# Altium PCB ESP32-S3.PcbDoc
Units mm, origin at the board's own origin, x right, y up, seen from the top; angles counter-clockwise.
Board outline 66.25 x 50.53 mm, 4 copper layers ([1] Signal, [2] GND, [3] Power, [4] Signal), stack 1.586 mm thick; 88 components, 64 nets, 347 pads, 177 vias.
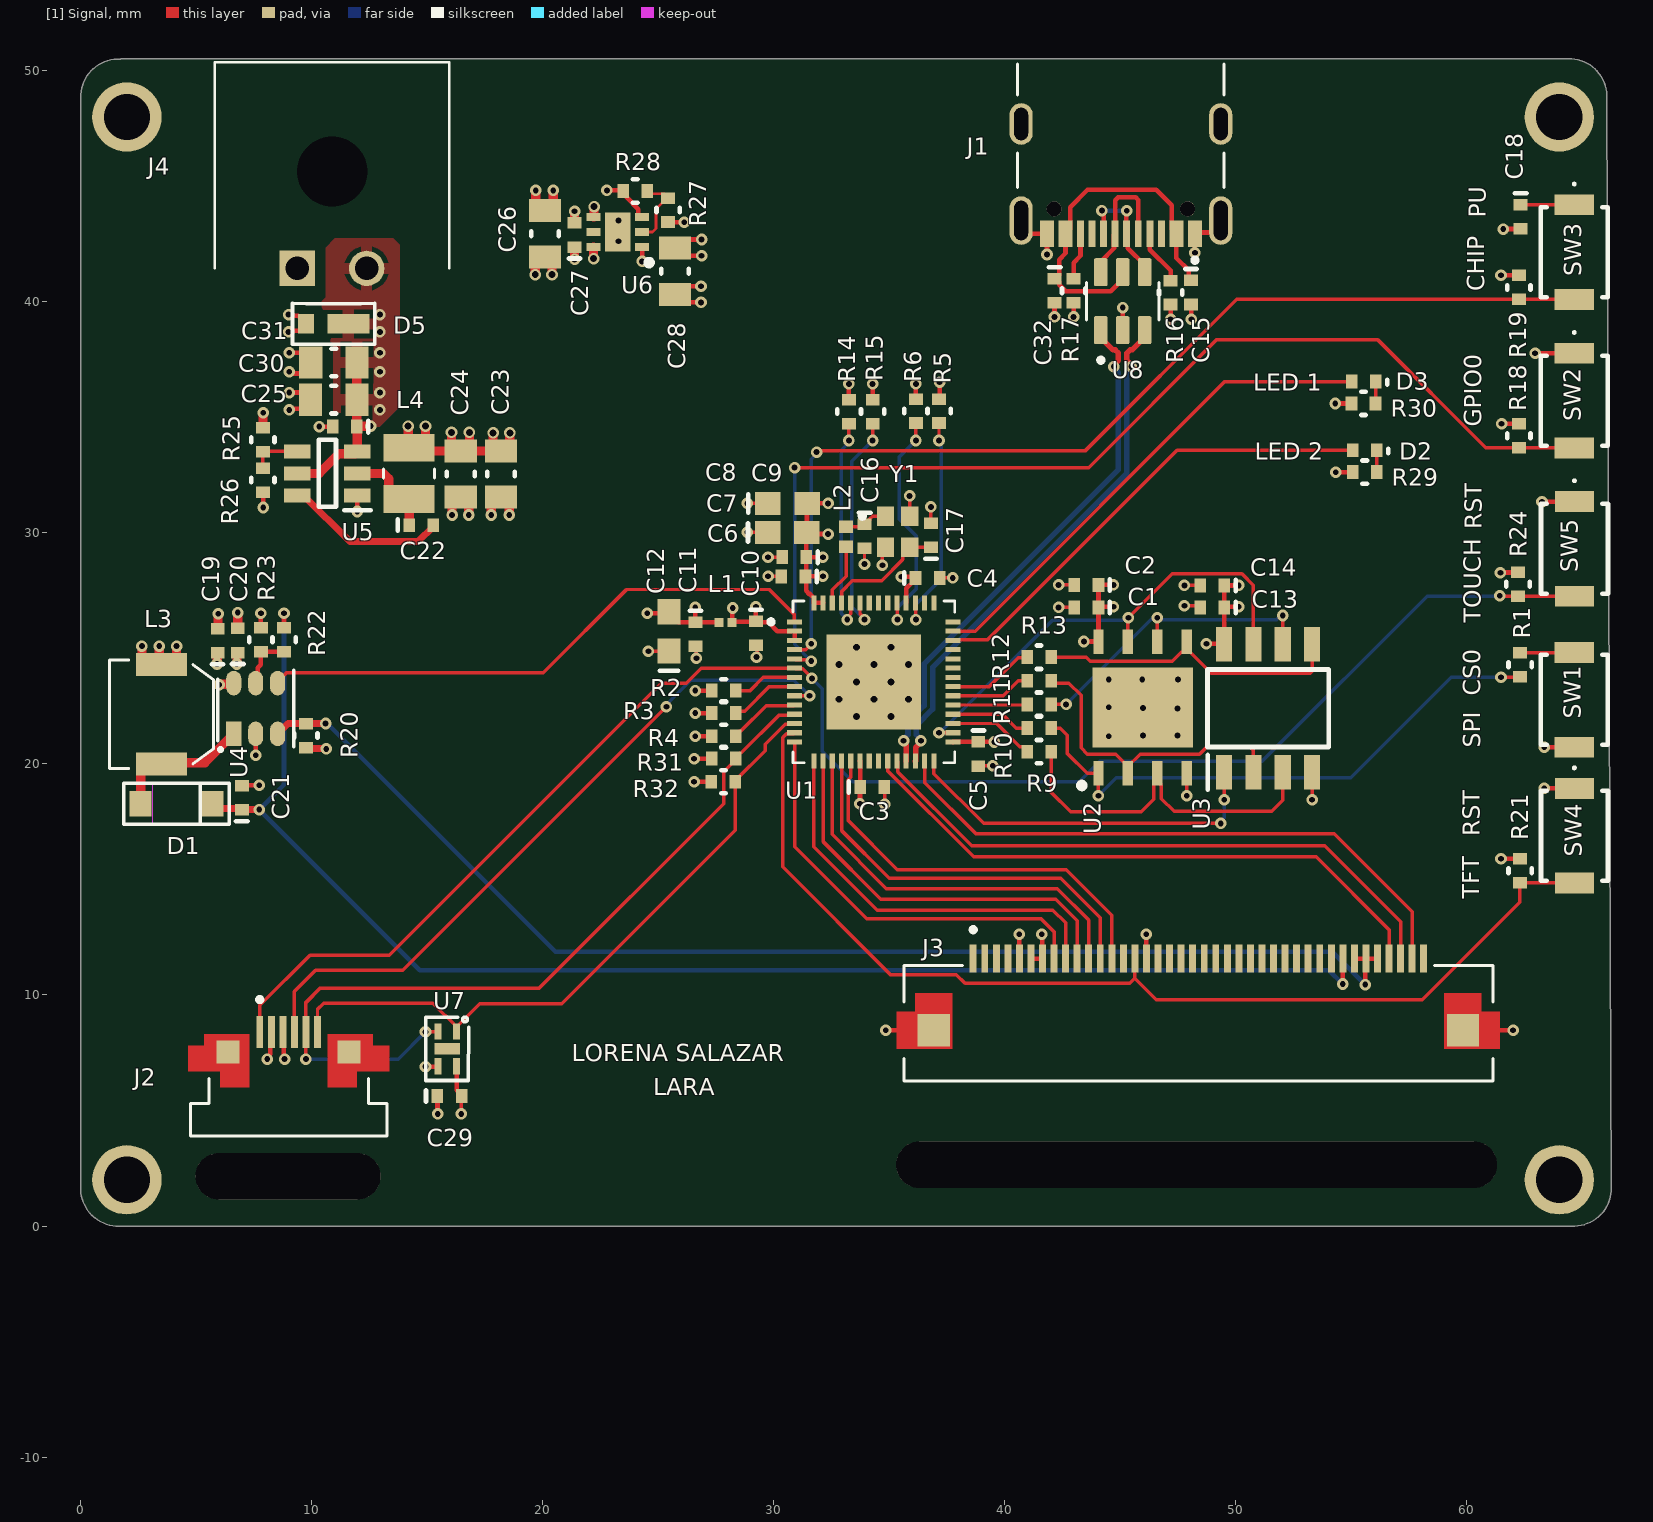
[diagram p0: [1] Signal view]
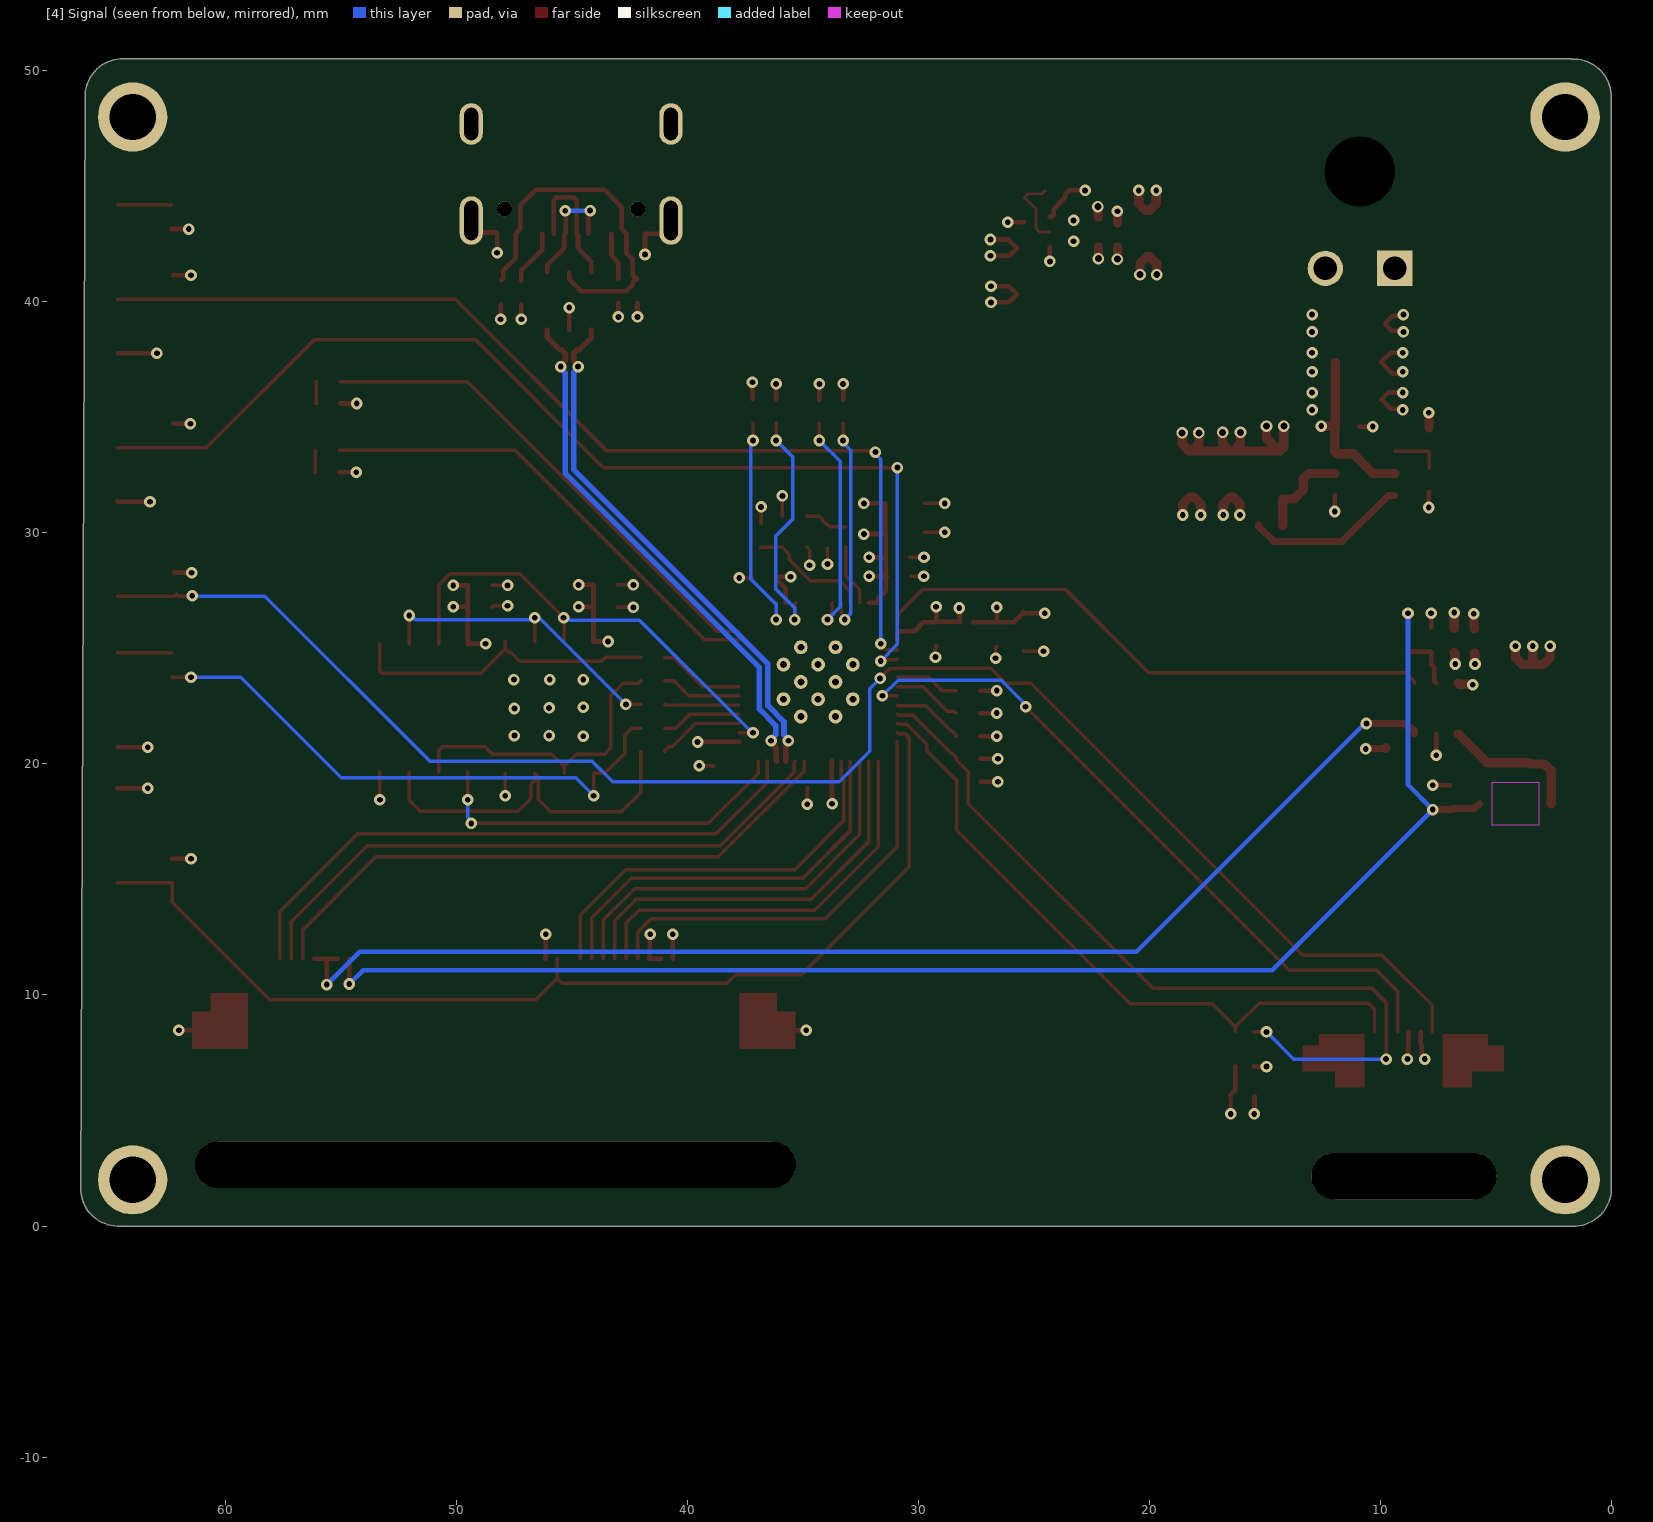
[diagram p1: [4] Signal view, seen from below]
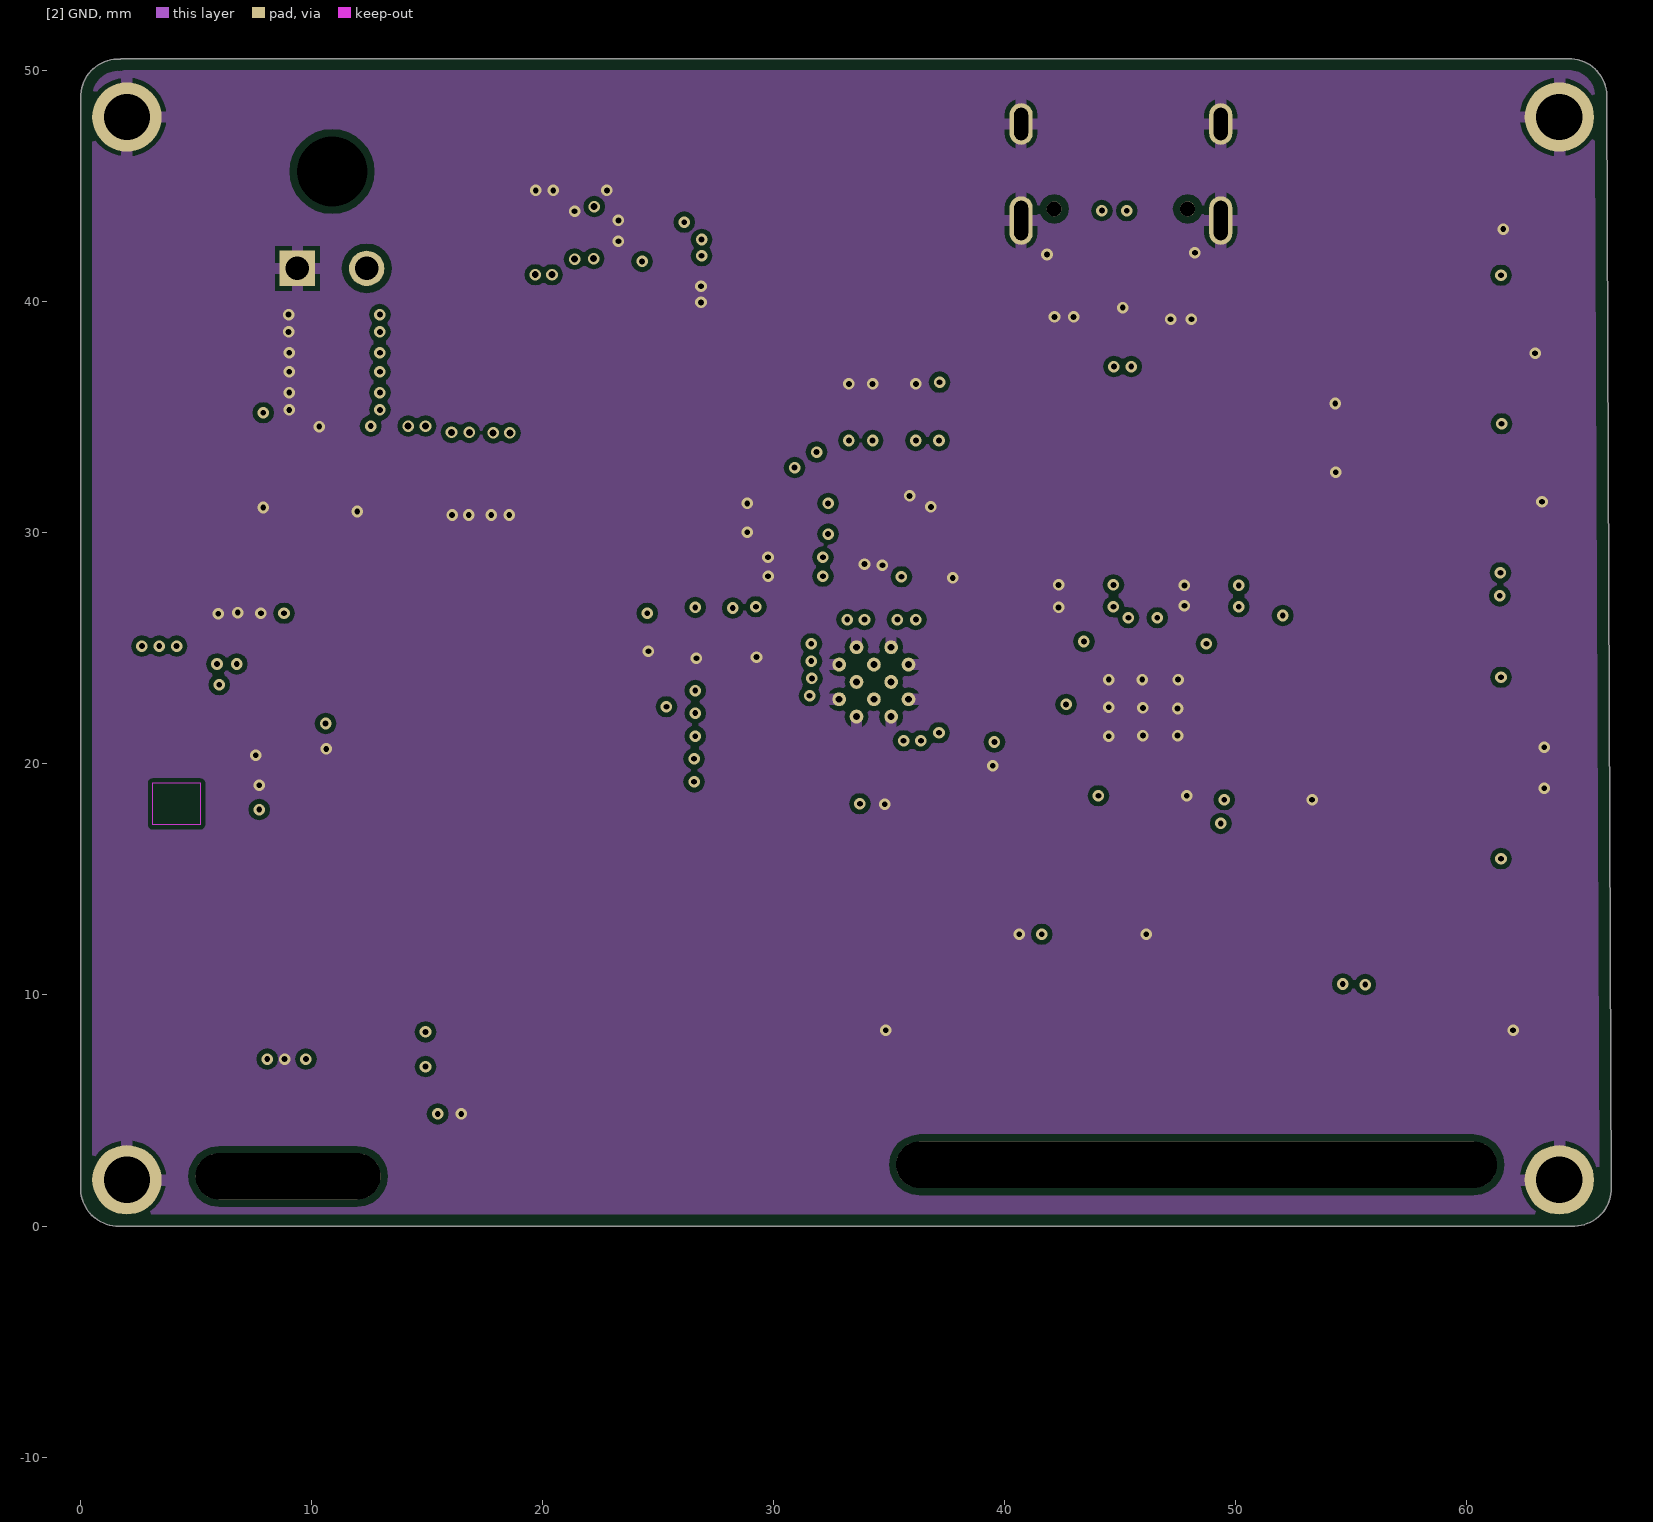
[diagram p2: [2] GND]
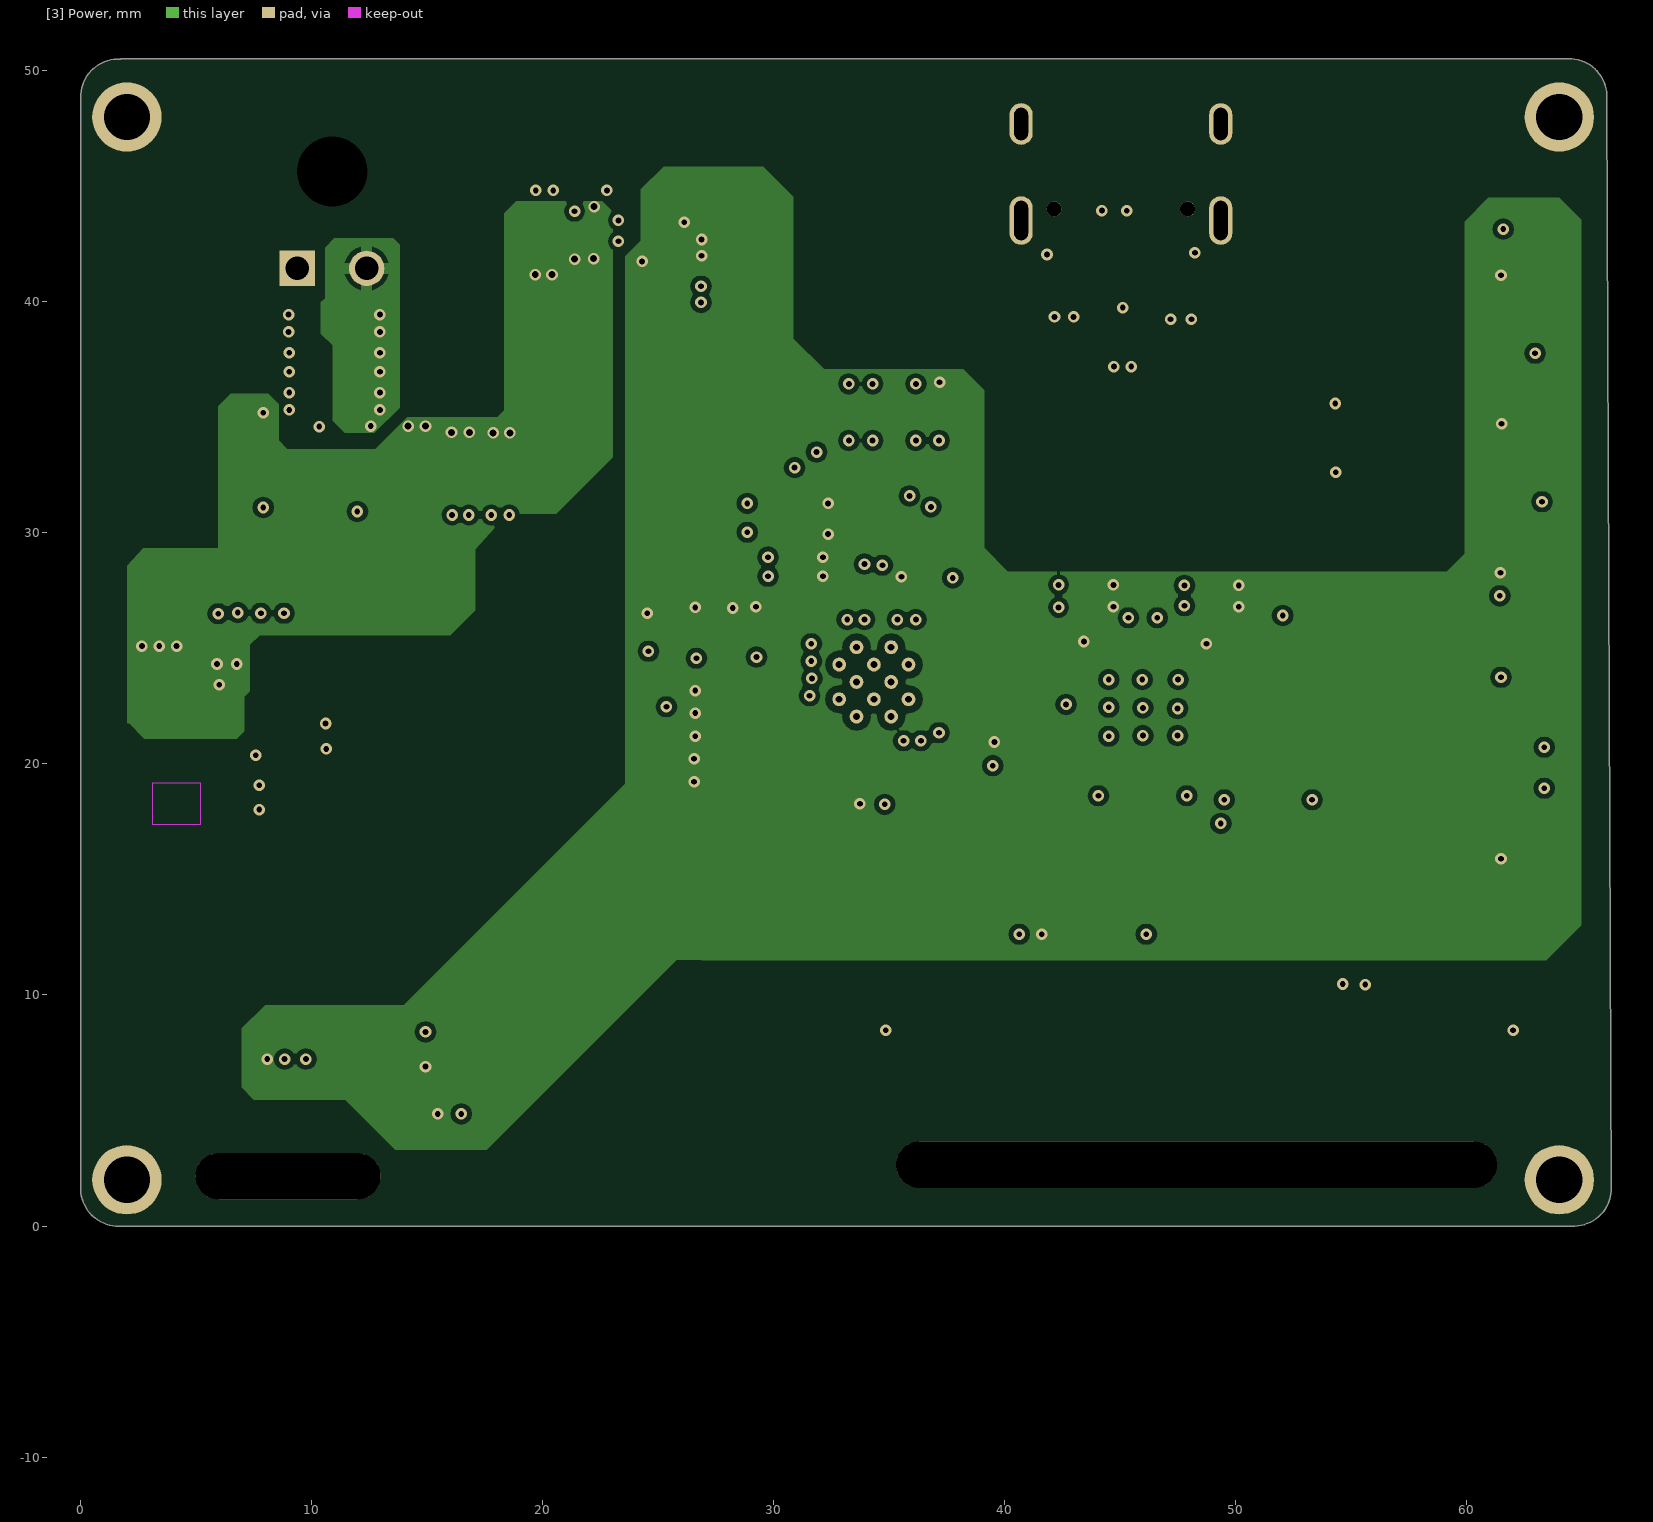
[diagram p3: [3] Power]
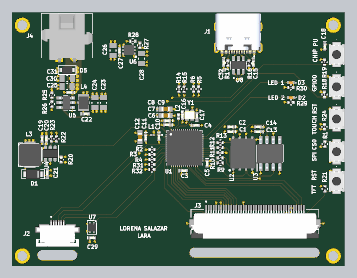
[diagram p4: 3D render of the assembled board from above, using the file's embedded part models]

## Layer stack, top to bottom
Top Solder: solder mask 0.0102, Solder Resist, Dk 3.5
[1] Signal: signal copper 0.035
Dielectric 2: prepreg 0.2104, PP-022, Dk 4.5
[2] GND: signal copper 0.0152
Dielectric 1: core 1.065, Core-009, Dk 4.5
[3] Power: signal copper 0.0152
Dielectric 3: prepreg 0.2104, PP-022, Dk 4.5
[4] Signal: signal copper 0.035
Bottom Solder: solder mask 0.0102, Solder Resist, Dk 3.5

## Board outline
1.525,0 cw(c1.625,1.625) 0,1.725 0,49.025 0,48.975 cw(c1.625,48.875) 1.725,50.5 1.725,50.525 64.525,50.525 cw(c64.425,48.9) 66.05,48.8 66.045,48.775 66.25,1.525 cw(c64.625,1.625) 64.525,0

## Design rules (kind name [scope] priority, off if disabled: settings)
BoardOutlineClearance [All] p1: gap=0.5 ignorepadtopadclearanceinfootprint=FALSE
Clearance [All] p1: gap=0.254 ignorepadtopadclearanceinfootprint=FALSE except(0.127: Arc-Arc Arc-Track Arc-SMDPad Arc-Via Track-Track Track-SMDPad Track-Via SMDPad-Via; 0.152: SMDPad-SMDPad; 0.203: Arc-Fill Arc-Poly Arc-Region Track-Fill Track-Poly Track-Region Via-Fill Via-Poly Via-Region Fill-Fill Fill-Poly Fill-Region Poly-Poly Poly-Region Region-Region; 0.25: Via-Via; 0.3: SMDPad-Fill SMDPad-Poly SMDPad-Region THPad-Fill THPad-Poly THPad-Region; 0.35: SMDPad-THPad THPad-THPad THPad-Via THPad-Text THPad-Hole)
DiffPairsRouting [InDifferentialPairClass('90_OHM_DIFF')] p1: maxlimit=0.127 minlimit=0.127 mostfreqgap=0.127 toplayer_minwidth=0.24 toplayer_maxwidth=0.24 toplayer_prefwidth=0.24 midlayer1_minwidth=0.153 midlayer1_maxwidth=0.153 midlayer1_prefwidth=0.153 midlayer2_minwidth=0.153 midlayer2_maxwidth=0.153 midlayer2_prefwidth=0.153 bottomlayer_minwidth=0.24 bottomlayer_maxwidth=0.24 bottomlayer_prefwidth=0.24 impedanceprofiledriven=TRUE impedanceprofileid={68003449-C027-477C-B721-608CC1375145} impedanceprofilevalue=90.000000 maxuncoupledlength=12.7
HoleSize [All] p1: absolutevalues=TRUE maxlimit=6.2 minlimit=0.25 maxpercent=80.000 minpercent=20.000
HoleToHoleClearance [All] p1: gap=0.2 allowstackedmicrovias=TRUE
MinimumSolderMaskSliver [All] p1: minsoldermaskwidth=0.13
PlaneConnect [All] p1: planeconnectstyle=Relief reliefexpansion=0.3 reliefentries=4 reliefconductorwidth=0.3 reliefairgap=0.2
PolygonConnect [All] p1: thpad.connectstyle=Relief thpad.reliefconductorwidth=0.5 thpad.reliefentries=4 thpad.polygonreliefangle="90 Angle" thpad.airgapwidth=0.2 smdpad.connectstyle=Relief smdpad.reliefconductorwidth=0.5 smdpad.reliefentries=4 smdpad.polygonreliefangle="90 Angle" smdpad.airgapwidth=0.2 via.connectstyle=Direct via.reliefconductorwidth=0.254 via.reliefentries=4 via.polygonreliefangle="90 Angle" via.airgapwidth=0.254
RoutingVias [All] p1: holewidth=0.25 width=0.5 viastyle="Through Hole" minholewidth=0.2 minwidth=0.2 maxholewidth=0.25 maxwidth=0.5
SilkToSolderMaskClearance [IsPad] p1: minsilkscreentomaskgap=0.15 clearancetoexposedcopper=TRUE
SolderMaskExpansion [All] p1: expansion=0.076 istentingtop=FALSE
UnRoutedNet [All] p1: checkbadconnections=TRUE
Width [All] p1: maxlimit=2 minlimit=0.127 preferedwidth=0.254
23 further rules are at their usual default settings.

## Classes and differential pairs
differential pair class 90_OHM_DIFF: USB
component class "U_[3] Voltage Converters": C22 C23 C24 C25 C26 C27 C28 C30 C31 D5 J4 L4 R25 R26 R27 R28 U5 U6
component class "U_[4] Temperature_Sensor": C29 R31 R32 U7
component class "U_[2] Led_Driver": C19 C20 C21 D1 J2 J3 L3 R20 R21 R22 R23 R24 SW4 SW5 U4
component class "U_[1] ESP32-S3": C1 C2 C3 C4 C5 C6 C7 C8 C9 C10 C11 C12 C13 C14 C15 C16 C17 C18 C32 D2 D3 J1 L1 L2 R1 R2 R3 R4 R5 R6 R9 R10 R11 R12 R13 R14 R15 R16 R17 R18 R19 R29 R30 SW1 SW2 SW3 U1 U2 U3 U8 Y1
differential pair USB: +USB_P -USB_N

## Components (designator, comment, footprint, x,y, rotation, side; value= is the part's Value field where it differs from the comment)
C1 "100nF" "Capacitor 0402" 43.023,26.775 r0 top
C2 "4.7uF" "Capacitor 0402" 43.023,27.75 r0 top
C3 "100nF" "Capacitor 0402" 34.769,19 r180 top
C4 "100nF" "Capacitor 0402" 37.164,28.05 r180 top
C5 "1uF" "Capacitor 0402" 38.85,19.923 r90 top
C6 "100nF" "Capacitor 0402" 30.342,28.119 r0 top
C7 "1uF" "Capacitor 0402" 30.373,28.95 r0 top
C8 "10uF" "Capacitor 0603" 29.696,30.019 r0 top
C9 "10uF" "Capacitor 0603" 29.702,31.275 r0 top
C10 "100nF" "Capacitor 0402" 29.231,25.15 r90 top
C11 "1uF" "Capacitor 0402" 26.606,25.1 r90 top
C12 "10uF" "Capacitor 0603" 25.456,24.85 r90 top
C13 "100nF" "Capacitor 0402" 48.473,26.775 r0 top
C14 "1uF" "Capacitor 0402" 48.473,27.725 r0 top
C15 "2.2uF" "Capacitor 0402" 48.05,39.9 r90 top
C16 "10pF" "Capacitor 0402" 33.931,29.35 r90 top
C17 "10pF" "Capacitor 0402" 36.806,30.4 r270 top
C18 "1uF" "Capacitor 0402" 62.325,43.175 r90 top
C19 "10uF" "Capacitor 0402" 5.929,25.835 r270 top
C20 "10nF" "Capacitor 0402" 6.8,25.85 r270 top
C21 "1uF" "Capacitor 0402" 6.975,19.05 r270 top
C22 "100nF" "Capacitor 0402" 15.25,30.333 r180 top
C23 "22uF" "CAPACITOR 0805" 18.192,32.55 r90 top
C24 "22uF" "CAPACITOR 0805" 16.45,32.55 r90 top
C25 "100nF" "Capacitor 0402" 10.925,34.6 r0 top
C26 "2.2uF" "CAPACITOR 0805" 20.1,42.95 r270 top
C27 "100nF" "Capacitor 0402" 21.375,43.4 r270 top
C28 "2.2uF" "CAPACITOR 0805" 25.725,41.325 r90 top
C29 "100nF" "Capacitor 0402" 16.469,5.62 r180 top
C30 "10uF" "CAPACITOR 0805" 10.951,35.77 r0 top
C31 "10uF" "CAPACITOR 0805" 10.956,37.376 r0 top
C32 "100nF" "Capacitor 0402" 42.155,39.976 r90 top
D1 "SS2040FL_R1_00001" CR_R1_00001_PNJ 4.15,18.275 r180 top
D2 "Led 0402" "LED 0402" 55.58,33.576 r0 top
D3 "Led 0402" "LED 0402" 55.53,36.551 r0 top
D5 "CUHZ16V,H3F" SOD-323HEUS2H_TOS 10.945,39.048 r180 top
J1 "UJ20-C-H-G-SMT-1-P16-TR" SAMESKY_UJ20-C-H-G-SMT-1-P16-TR 45.025,50.3 r180 top
J2 "SFV6R-2STBE1HLF" AMPHENOL_SFV6R-2STBE1HLF 9,6 r0 top locked
J3 "62684-402100ALF" AMPHENOL_62684-402100ALF 48.38,8 r0 top locked
J4 "2-1445098-2" 214450982 9.379,41.449 r180 top
L1 "MLG0603P2N0BT000" INDC0603X33N 27.906,26.125 r0 top
L2 "MLG1005S2N2CT000" INDC1005X55N 33.131,29.825 r90 top
L3 "1235AS-H-6R8M=P3" IND_1235AS-H-6R8M=P3 3.5,22.15 r270 top
L4 "MAMK2520T3R3M" INDC2520X120N 14.208,32.575 r90 top
R1 "4.7k" "Resistencia 0402" 62.3,24.294 r90 top
R2 "10K" "Resistencia 0402" 27.831,23.171 r180 top
R3 "10K" "Resistencia 0402" 27.831,22.2 r180 top
R4 "10K" "Resistencia 0402" 27.831,21.2 r180 top
R5 "10K" "Resistencia 0402" 37.156,35.275 r90 top
R6 "10K" "Resistencia 0402" 36.156,35.275 r270 top
R9 "0" "Resistencia 0402" 41.481,20.525 r0 top
R10 "0" "Resistencia 0402" 41.481,21.55 r180 top
R11 "0" "Resistencia 0402" 41.481,22.575 r0 top
R12 "0" "Resistencia 0402" 41.481,23.6 r0 top
R13 "0" "Resistencia 0402" 41.481,24.625 r0 top
R14 "10K" "Resistencia 0402" 33.256,35.25 r270 top
R15 "10K" "Resistencia 0402" 34.281,35.25 r270 top
R16 "5.1k" "Resistencia 0402" 47.175,40.404 r90 top
R17 "5.1k" "Resistencia 0402" 42.975,40.479 r90 top
R18 "10K" "Resistencia 0402" 62.25,34.2 r90 top
R19 "10K" "Resistencia 0402" 62.25,40.625 r90 top
R20 "10" "Resistencia 0402" 9.75,21.225 r90 top
R21 "10K" "Resistencia 0402" 62.3,15.379 r90 top
R22 "200k" "Resistencia 0402" 8.8,25.375 r90 top
R23 "10k" "Resistencia 0402" 7.8,25.375 r270 top
R24 "10K" "Resistencia 0402" 62.211,27.779 r90 top
R25 "52.3k" "Resistencia 0402" 7.888,34.031 r90 top
R26 "10K" "Resistencia 0402" 7.888,32.288 r90 top
R27 "50k" "Resistencia 0402" 25.425,43.975 r270 top
R28 "10K" "Resistencia 0402" 24,44.8 r0 top
R29 "220" "Resistencia 0402" 55.574,32.63 r180 top
R30 "220" "Resistencia 0402" 55.524,35.605 r180 top
R31 "10K" "Resistencia 0402" 27.826,20.237 r180 top
R32 "10K" "Resistencia 0402" 27.819,19.232 r180 top
SW1 "AMPTFP2VTR" AMPTFP2VTR 64.65,22.775 r90 top
SW2 "AMPTFP2VTR" AMPTFP2VTR 64.65,35.725 r270 top
SW3 "AMPTFP2VTR" AMPTFP2VTR 64.65,42.15 r270 top
SW4 "AMPTFP2VTR" AMPTFP2VTR 64.655,16.892 r270 top
SW5 "AMPTFP2VTR" AMPTFP2VTR 64.655,29.309 r270 top
U1 "ESP32-S3" IC_ESP32-S3 34.331,23.55 r0 top
U2 "W25Q128JVPIM" SON127P600X500X80-9N-D 45.961,22.442 r90 top
U3 "APS1604M-3SQR-SN" SOIC127P600X165-8N 51.396,22.41 r90 top
U4 "AP3032KTR-G1" SOT23-6_DIO 7.575,22.4 r90 top
U5 "AP62150WU-7" SOT95P280X100-6N 10.675,32.575 r180 top
U6 "TPS74601PBDRVR" SON65P200X200X80-7N 23.25,43.025 r180 top
U7 "SHT40-AD1B-R2" SHT4x_SEN 15.869,7.67 r270 top
U8 "USBLC6-2SC6" SOT95P280X145-6N 45.099,40.03 r90 top
Y1 "ECS-400-10-37B2-CKY-TR" XTAL_ECS-400-10-37B2-CKY-TR 35.356,30.05 r270 top

## Footprints (in the part's own frame and the unit in brackets; to place one, negate y for a bottom-side part, rotate by r counter-clockwise, add the part's x,y. Pads: shape width x height; smd on the part's side, far side on the other; paste and mask are expansions set on the pad)
214450982 [mm]
  rect 1.53x1.53 hole 1.02: 1(0,0)
  round 1.53 hole 1.02: 2(-3,0)
  round 1.525 hole 3.05 unplated: MH1(-1.5,-4.193)
  silkscreen extent -6.57,-8.92 3.57,0, body extent -6.59,-8.89 3.55,0.84, height 5.77
AMPHENOL_62684-402100ALF [mm]
  rect 0.3x1.2 smd: 01(-9.75,3.575) 02(-9.25,3.575) 03(-8.75,3.575) 04(-8.25,3.575) 05(-7.75,3.575) 06(-7.25,3.575) 07(-6.75,3.575) 08(-6.25,3.575) 09(-5.75,3.575) 10(-5.25,3.575) 11(-4.75,3.575) 12(-4.25,3.575) 13(-3.75,3.575) 14(-3.25,3.575) 15(-2.75,3.575) 16(-2.25,3.575) 17(-1.75,3.575) 18(-1.25,3.575) 19(-0.75,3.575) 20(-0.25,3.575) 21(0.25,3.575) 22(0.75,3.575) 23(1.25,3.575) 24(1.75,3.575) 25(2.25,3.575) 26(2.75,3.575) 27(3.25,3.575) 28(3.75,3.575) 29(4.25,3.575) 30(4.75,3.575) 31(5.25,3.575) 32(5.75,3.575) 33(6.25,3.575) 34(6.75,3.575) 35(7.25,3.575) 36(7.75,3.575) 37(8.25,3.575) 38(8.75,3.575) 39(9.25,3.575) 40(9.75,3.575)
  rect 1.4x1.4 smd paste-2 mask+0: S1(-11.45,0.475) S2(11.45,0.475)
  [1] Signal region: 12.25,1.275 13.05,1.275 13.05,-0.325 10.65,-0.325 10.65,2.075 12.25,2.075
  [1] Signal region: -10.65,-0.325 -13.05,-0.325 -13.05,1.275 -12.25,1.275 -12.25,2.075 -10.65,2.075
  silkscreen extent -12.75,-1.73 12.75,4.92, body extent -12.75,-2.5 12.75,3.1, height 2
AMPHENOL_SFV6R-2STBE1HLF [mm]
  rect 0.3x1.4 smd: 1(-1.25,2.4) 2(-0.75,2.4) 3(-0.25,2.4) 4(0.25,2.4) 5(0.75,2.4) 6(1.25,2.4)
  rect 1x1 smd paste-1 mask+0: SH1(-2.62,1.53) SH2(2.62,1.53)
  [1] Signal region: -1.7,0 -2.95,0 -2.95,0.7 -4.35,0.7 -4.35,1.8 -3.65,1.8 -3.65,2.3 -1.7,2.3
  [1] Signal region: 3.65,1.8 4.35,1.8 4.35,0.7 2.95,0.7 2.95,0 1.7,0 1.7,2.3 3.65,2.3
  silkscreen extent -4.25,-2.1 4.25,3.9, body extent -4.25,-2.1 4.25,2.8, height 1.87
AMPTFP2VTR [mm]
  rect 0.9x1.7 smd: 1(-2.05,0) 2(2.05,0)
  silkscreen extent -3,-1.45 1.95,1.45, body extent -2.39,-1.45 2.41,1.45, height 1.95
"Capacitor 0402" [mm] "Capacitor 0402"
  rect 0.5x0.6 smd: 1(-0.015,0) 2(1.031,0)
  silkscreen extent 1.52,-0.25 1.52,0.25, body extent 0.01,-0.26 1.01,0.27, height 0.36
"Capacitor 0603" [mm] "Chip Capacitor 0603 SMD"
  rect 1.1x1 smd: 1(0.039,0) 2(1.739,0)
  silkscreen extent -0.81,-0.4 -0.81,0.4, body extent 0.09,-0.4 1.69,0.4, height 0.9
"CAPACITOR 0805" [mm] "SMD CAPACITOR"
  rect 1x1.4 smd: 1(-1,0) 2(1,0)
  silkscreen extent -0.1,-0.6 0.1,0.6, body extent -1.05,-0.65 1.05,0.65, height 1
CR_R1_00001_PNJ [mil]
  rect 37.87x43 smd paste+0 mask+0: 1(-61.44,0) 2(61.44,0)
  [1] Signal keep-out region: -40.5,-35.5 -40.5,35.5 40.5,35.5 40.5,-35.5
  Keep-Out Layer region: -40.5,-35.5 -40.5,35.5 40.5,35.5 40.5,-35.5
  silkscreen extent -90,-35 90,35, body extent -73,-37 73,37, height 43
IC_ESP32-S3 [mm]
  rect 0.65x0.22 smd mask+0.05: 1(-3.425,2.6) 2(-3.425,2.2) 3(-3.425,1.8) 4(-3.425,1.4) 5(-3.425,1) 6(-3.425,0.6) 7(-3.425,0.2) 8(-3.425,-0.2) 9(-3.425,-0.6) 10(-3.425,-1) 11(-3.425,-1.4) 12(-3.425,-1.8) 13(-3.425,-2.2) 14(-3.425,-2.6) 29(3.425,-2.6) 30(3.425,-2.2) 31(3.425,-1.8) 32(3.425,-1.4) 33(3.425,-1) 34(3.425,-0.6) 35(3.425,-0.2) 36(3.425,0.2) 37(3.425,0.6) 38(3.425,1) 39(3.425,1.4) 40(3.425,1.8) 41(3.425,2.2) 42(3.425,2.6)
  rect 0.22x0.65 smd mask+0.05: 15(-2.6,-3.425) 16(-2.2,-3.425) 17(-1.8,-3.425) 18(-1.4,-3.425) 19(-1,-3.425) 20(-0.6,-3.425) 21(-0.2,-3.425) 22(0.2,-3.425) 23(0.6,-3.425) 24(1,-3.425) 25(1.4,-3.425) 26(1.8,-3.425) 27(2.2,-3.425) 28(2.6,-3.425) 43(2.6,3.425) 44(2.2,3.425) 45(1.8,3.425) 46(1.4,3.425) 47(1,3.425) 48(0.6,3.425) 49(0.2,3.425) 50(-0.2,3.425) 51(-0.6,3.425) 52(-1,3.425) 53(-1.4,3.425) 54(-1.8,3.425) 55(-2.2,3.425) 56(-2.6,3.425)
  rect 4.1x4.1 smd paste-1.55: 57(0,0)
  round 0.6 hole 0.3 mask+0: 58(-0.75,1.5) 59(0.75,1.5) 60(-1.5,0.75) 61(0,0.75) 62(1.5,0.75) 63(-0.75,0) 64(0.75,0) 65(-1.5,-0.75) 66(0,-0.75) 67(1.5,-0.75) 68(-0.75,-1.5) 69(0.75,-1.5)
  silkscreen extent -4.55,-3.5 3.5,3.5, body extent -3.5,-3.5 3.5,3.5, height 0.9
IND_1235AS-H-6R8M=P3 [mm]
  rect 1x2.2 smd: 1(-2.15,0) 2(2.15,0)
  silkscreen extent -2.35,-2.25 2.35,2.25, body extent -2.35,-2.25 2.35,2.25, height 1.8
INDC0603X33N [mm]
  rect 0.38x0.4 smd: 1(-0.281,0) 2(0.281,0)
INDC1005X55N [mm]
  rect 0.54x0.6 smd: 1(-0.432,0) 2(0.432,0)
  body extent -0.5,-0.25 0.5,0.25, height 0.55
INDC2520X120N [mm]
  rect 1.2x2.22 smd: 1(-1.11,0) 2(1.11,0)
  silkscreen extent -0.19,-1.1 0.19,1.1, body extent -1.25,-1 1.25,1, height 1.2
"LED 0402" [mm] "LED SMD 0402"
  rect 0.5x0.6 smd: 1(-0.519,0) 2(0.519,0)
  silkscreen extent 1.02,-0.13 1.02,0.07, body extent -0.5,-0.25 0.51,0.25, height 0.45
"Resistencia 0402" [mm]
  rect 0.5x0.6 smd: 1(-0.519,0) 2(0.519,0)
  silkscreen extent -0.1,-0.5 0.1,0.5, body extent -0.57,-0.27 0.58,0.28, height 0.41
SAMESKY_UJ20-C-H-G-SMT-1-P16-TR [mm]
  rect 0.6x1.15 smd: A1_B12(-3.2,7.345) A4_B9(-2.4,7.345) B1_A12(3.2,7.345) B4_A9(2.4,7.345)
  rect 0.3x1.15 smd: A5(-1.25,7.345) A6(-0.25,7.345) A7(0.25,7.345) A8(1.25,7.345) B5(1.75,7.345) B6(0.75,7.345) B7(-0.75,7.345) B8(-1.75,7.345)
  oval 1x2.1 hole 0.6 slot 1.7 at 90 deg: SH1(-4.32,6.78) SH2(4.32,6.78)
  oval 1x1.8 hole 0.6 slot 1.4 at 90 deg: SH3(-4.32,2.6) SH4(4.32,2.6)
  round 0.65 hole 0.65 unplated: ""(-2.89,6.28) ""(2.89,6.28)
  silkscreen extent -4.47,0 4.47,8.6, body extent -4.47,0 4.47,7.6, height 3.31
SHT4x_SEN [mil]
  rect 28x12 smd paste+0 mask+0: 1(-29.5,15.75) 2(-29.5,-15.75) 3(29.5,-15.75) 4(29.5,15.75)
  rect 20x43 smd paste+0 mask+0: 5(0,0)
  silkscreen extent -54,-37 54,37, body extent -31,-31 31,31, height 23
SOD-323HEUS2H_TOS [mil]
  rect 71x33 smd paste+0 mask+0: 1(-25.5,0)
  rect 28x33 smd paste+0 mask+0: 2(47,0)
  silkscreen extent -70,-35 70,35, body extent -53,-29 53,29, height 27
SOIC127P600X165-8N [mm]
  rect 1.5x0.7 smd: 1(-2.775,1.905) 2(-2.775,0.635) 3(-2.775,-0.635) 4(-2.775,-1.905) 5(2.775,-1.905) 6(2.775,-0.635) 7(2.775,0.635) 8(2.775,1.905)
  silkscreen extent -3.53,-2.63 1.67,2.63, body extent -3,-2.63 3,2.63, height 1.65
SON65P200X200X80-7N [mm]
  rect 0.6x0.35 smd: 1(-1.05,0.65) 2(-1.05,0) 3(-1.05,-0.65) 4(1.05,-0.65) 5(1.05,0) 6(1.05,0.65)
  rect 1.1x1.7 smd: 7(0,0)
  silkscreen extent -1.48,1.2 -1.23,1.45, body extent -1,-1 1,1, height 0.8
SON127P600X500X80-9N-D [mm]
  rect 1.05x0.45 smd: 1(-2.85,1.905) 2(-2.85,0.635) 3(-2.85,-0.635) 4(-2.85,-1.905) 5(2.85,-1.905) 6(2.85,-0.635) 7(2.85,0.635) 8(2.85,1.905)
  rect 3.45x4.35 smd: 9(0,0)
  silkscreen extent -3.5,2.5 -3.25,2.75, body extent -3.05,-2.5 3.05,2.5, height 0.8
SOT23-6_DIO [mm]
  rect 1.06x0.65 smd paste+0 mask+0: 1(-1.1,0.95)
  oval 1.06x0.65 smd paste+0 mask+0: 2(-1.1,0) 3(-1.1,-0.95) 4(1.1,-0.95) 5(1.1,0) 6(1.1,0.95)
  silkscreen extent -1.85,-1.65 1.65,1.65, body extent -1.28,-1.5 1.28,1.5, height 1.45
SOT95P280X100-6N [mm]
  rect 1.15x0.6 smd: 1(-1.3,0.95) 2(-1.3,0) 3(-1.3,-0.95) 4(1.3,-0.95) 5(1.3,0) 6(1.3,0.95)
  silkscreen extent -1.88,-1.45 0.38,1.6, body extent -1.53,-1.45 1.27,1.45, height 1
SOT95P280X145-6N [mm]
  rrect25% 1.21x0.59 smd: 1(-1.255,0.95) 2(-1.255,0) 3(-1.255,-0.95) 4(1.255,-0.95) 5(1.255,0) 6(1.255,0.95)
  silkscreen extent -2.65,-1.57 0.81,1.56, body extent -1.4,-1.46 1.4,1.46, height 0.4
XTAL_ECS-400-10-37B2-CKY-TR [mm]
  rect 0.85x0.75 smd: 1(-0.675,-0.525) 2(0.675,-0.525) 3(0.675,0.525) 4(-0.675,0.525)
  silkscreen extent -0.77,-1.62 -0.58,-1.42, body extent -1,-0.8 1,0.8, height 0.5

## Part data
C1 C2 C3 C4 C5 C6 C7 C10 C11 C13 C14 C15 C16 C17 C18 C19 C20 C21 C22 C25 C27 C29 C32: library part "Capacitor 0402", "Capacitor Ceramico SMD 0402"
C8 C9 C12: library part "Capacitor 0603", "Capacitor Ceramico SMD 0603"
C23 C24 C26 C28 C30 C31: library part "Capacitor 0805", "Capacitor Cerámico SMD 0805"
D1: "Description", Manufacturer_Name=Panjit, Copyright="Copyright (C) 2026 Ultra Librarian. All rights reserved.", Manufacturer_Part_Number=SS2040FL_R1_00001
D2 D3: library part "LED 0402", "LED SMD 0402"
D5: "16 V TVS Diode, SOD-323HE(US2H)", Manufacturer_Name="Toshiba Electronic Devices & Storage Corp.", Copyright="Copyright (C) 2025 Ultra Librarian. All rights reserved.", Manufacturer_Part_Number=CUHZ16V,H3F
J1: "USB-C (USB TYPE-C) USB 2.0 Receptacle Connector 24 (16+8 Dummy) Position Surface Mount, Right Angle; Through Hole", Package=None, Check_prices=https://www.snapeda.com/parts/UJ20-C-H-G-SMT-1-P16-TR/Same+Sky/view-part/?ref=eda, MF="Same Sky", MP=UJ20-C-H-G-SMT-1-P16-TR, SnapEDA_Link=https://www.snapeda.com/parts/UJ20-C-H-G-SMT-1-P16-TR/Same+Sky/view-part/?ref=snap
J2 Y1: Package=None, Availability=Unavailable, Price=None
  J2: MP=SFV6R-2STBE1HLF
  Y1: MP=ECS-400-10-37B2-CKY-TR
J3: "Conn Rect FPC/FFC 40Cnt SMT OPUSeries ZIF 0.5mmPitch RtAngle", Package=None, Check_prices=https://www.snapeda.com/parts/62684-402100ALF/Amphenol+FCI/view-part/?ref=eda, MF="Amphenol ICC", MP=62684-402100ALF, SnapEDA_Link=https://www.snapeda.com/parts/62684-402100ALF/Amphenol+FCI/view-part/?ref=snap
J4: "Configuration Features: Number of Rows 1", Manufacturer_Name="TE Connectivity", Mouser Part Number=571-2-1445098-2, ="Configuration Features: Number of Rows 1", Datasheet Link=https://www.te.com/commerce/DocumentDelivery/DDEController?Action=srchrtrv&DocNm=micro-mate-n-lok-connector-qrg&DocType=Data%20Sheet&DocLang=English&PartCntxt=2-1445098-2&DocFormat=pdf, Geometry.Height=5.67mm, Manufacturer_Part_Number=2-1445098-2, Mouser Price/Stock=https://www.mouser.co.uk/ProductDetail/TE-Connectivity-AMP/2-1445098-2?qs=Eu63EZxBwKKSsdV7%2Fa6T1Q%3D%3D
L1: "2 nH Unshielded Multilayer Inductor 600 mA 100mOhm Max 0201 (0603 Metric)", Package="0603 Taiyo Yuden", Availability="In Stock", Check_prices=https://www.snapeda.com/parts/MLG0603P2N0BT000/TDK/view-part/?ref=eda, MF=TDK, MP=MLG0603P2N0BT000, Price=None, Purchase-URL=https://pricing.snapeda.com/search/part/MLG0603P2N0BT000/?ref=eda, SnapEDA_Link=https://www.snapeda.com/parts/MLG0603P2N0BT000/TDK/view-part/?ref=snap
L2: "FIXED IND 2.2NH 900MA 150MOHM SM", Package="1005-2 TDK", Check_prices=https://www.snapeda.com/parts/MLG1005S2N2CT000/TDK/view-part/?ref=eda, MF="TDK Corporation", MP=MLG1005S2N2CT000, SnapEDA_Link=https://www.snapeda.com/parts/MLG1005S2N2CT000/TDK/view-part/?ref=snap
L3: "Inductor with Inductance: 6.8uH Tol. +/-20%, Package: 1818 (4745)", Package=NONSTANDARD, Check_prices=https://www.snapeda.com/parts/1235AS-H-6R8M=P3/Murata/view-part/1512974/?ref=eda, Digi-Key_Part_Number=490-14206-1-ND, MF=Murata, MP=1235AS-H-6R8M=P3, Purchase-URL=https://pricing.snapeda.com/search/part/1235AS-H-6R8M=P3/?ref=eda, SnapEDA_Link=https://www.snapeda.com/parts/1235AS-H-6R8M=P3/Murata/view-part/1512974/?ref=snap
L4: "3.3 ÂµH Shielded Drum Core, Wirewound Inductor 1.7 A 156mOhm Max 1008 (2520 Metric)", Package="2520 Taiyo Yuden", Check_prices=https://www.snapeda.com/parts/MAMK2520T3R3M/Taiyo+Yuden/view-part/?ref=eda, MF="Taiyo Yuden", MP=MAMK2520T3R3M, SnapEDA_Link=https://www.snapeda.com/parts/MAMK2520T3R3M/Taiyo+Yuden/view-part/?ref=snap
R1 R2 R3 R4 R5 R6 R9 R10 R11 R12 R13 R14 R15 R16 R17 R18 R19 R20 R21 R22 R23 R24 R25 R26 R27 R28 R29 R30 R31 R32: library part "Resistencia SMD 0402", "Resistencia SMD 0402"
SW1 SW2 SW3 SW4 SW5: "Tactile Switch SPST-NO Top Actuated Surface Mount", Manufacturer_Name=Apem, Mouser Part Number=642-AMPTFP2VTR, Datasheet Link=https://www.mouser.se/datasheet/2/26/apem_appms00196-1-1733699.pdf, Geometry.Height=2.2mm, Manufacturer_Part_Number=AMPTFP2VTR, Mouser Price/Stock=https://www.mouser.co.uk/ProductDetail/Apem/AMPTFP2VTR?qs=%252B9%2Fcbd0IE0SYwG%252BIJFZl2Q%3D%3D
U1: "IC RF TxRx + MCU Bluetooth, WiFi 802.11b/g/n, Bluetooth v5.0 2.412GHz ~ 2.484GHz 56-VFQFN Exposed Pad", Package=None, Availability="In Stock", Check_prices=https://www.snapeda.com/parts/ESP32-S3/Espressif+Systems/view-part/?ref=eda, MF="Espressif Systems", MP=ESP32-S3, Price=None, Purchase-URL=https://pricing.snapeda.com/search/part/ESP32-S3/?ref=eda, SnapEDA_Link=https://www.snapeda.com/parts/ESP32-S3/Espressif+Systems/view-part/?ref=snap
U2: "128M-bit Serial Flash Memory with uniform 4KB sectors and Dual/Quad SPI", Manufacturer_Name=Winbond, Mouser Part Number=454-W25Q128JVPIM, Datasheet Link=https://www.winbond.com/hq/search-resource-file.jsp?partNo=W25Q128JVPIM&type=datasheet, Geometry.Height=0.8mm, Manufacturer_Part_Number=W25Q128JVPIM, Mouser Price/Stock=https://www.mouser.co.uk/ProductDetail/Winbond/W25Q128JVPIM?qs=qSfuJ%252Bfl%2Fd62hi5N%252Bd7%252B%252BA%3D%3D
U3: "DRAM IoT RAM 16Mb QSPI (x1,x4) SDR 133/84MHz, RBX, 3V, Ind. Temp., SOP8"
U4: "Description", Manufacturer_Name="Diodes Inc", Copyright="Copyright (C) 2025 Ultra Librarian. All rights reserved.", Manufacturer_Part_Number=AP3032KTR-G1, RefDes=RefDes, Type=Type
U5: "Switching Voltage Regulators DCDC Conv HV Buck TSOT26 T&R 3K", Manufacturer_Name="Diodes Incorporated", Mouser Part Number=621-AP62150WU-7, Datasheet Link=https://www.diodes.com//assets/Datasheets/AP62150.pdf, Geometry.Height=1mm, Manufacturer_Part_Number=AP62150WU-7, Mouser Price/Stock=https://www.mouser.co.uk/ProductDetail/Diodes-Incorporated/AP62150WU-7?qs=yqaQSyyJnNgGPHe5Vg29cg%3D%3D
U6: "Adjustable 1-A low-dropout (LDO) linear regulator with power good", Manufacturer_Name="Texas Instruments", Mouser Part Number=595-TPS74601PBDRVR, Datasheet Link=http://www.ti.com/lit/gpn/TPS746, Geometry.Height=0.8mm, Manufacturer_Part_Number=TPS74601PBDRVR, Mouser Price/Stock=https://www.mouser.co.uk/ProductDetail/Texas-Instruments/TPS74601PBDRVR?qs=PqoDHHvF64%252B93w4aKhWy6Q%3D%3D
U7: "Humidity, Temperature 0 ~ 100% RH I2C ±1.8% RH Surface Mount", Manufacturer_Name=Sensirion, Copyright="Copyright (C) 2026 Ultra Librarian. All rights reserved.", Manufacturer_Part_Number=SHT40-AD1B-R2, RefDes=RefDes, Type=Type
U8: "17V Clamp 5A (8/20Âµs) Ipp Tvs Diode Surface Mount SOT-23-6", Package="SOT-23-6 STMicroelectronics", Availability="In Stock", Check_prices=https://www.snapeda.com/parts/USBLC6-2SC6/STMicroelectronics/view-part/?ref=eda, MF=STMicroelectronics, MP=USBLC6-2SC6, Price=None, Purchase-URL=https://pricing.snapeda.com/search/part/USBLC6-2SC6/?ref=eda, SnapEDA_Link=https://www.snapeda.com/parts/USBLC6-2SC6/STMicroelectronics/view-part/?ref=snap

## Free pads (board coordinates)
  round 3 hole 2: 3(2,2) 3(2,48) 3(64,2) 3(64,48)
  oval 8x2 hole 2 slot 8 at 0 deg: 3(8.975,2.15)
  oval 26x2 hole 2 slot 26 at 0 deg: 3(48.3,2.65)

## Via types
v1: diameter 0.5, hole 0.25, [1] Signal to [4] Signal, 166 vias
v2: diameter 0.5, hole 0.3, [1] Signal to [4] Signal, 11 vias

## Nets (pads, with @x,y where several pads share a name; then routed paths per layer and width w, separated by ;. In a path a pad name is that pad's centre, name@x,y a point inside that pad or via, vN(x,y) a via of type N, cw(c..) or ccw(c..) an arc to the next point about the centre after c; other vN are vias at no path point)
+5V: C19.2 C20.2 C23.2 C24.2 C26.2 C27.2 L3.1 L4.2 R25.2 U4.6 U6.4 U6.6 | length 19.3
  [1] Signal w0.4: v1(2.65,25.1) 2.65,24.6 2.95,24.3 L3.1 ; v1(3.4,25.1) 3.4,24.4 L3.1 ; v1(4.15,25.1) 4.15,24.6 3.85,24.3 L3.1 ; v1(5.9,24.325) 5.915,24.34 5.915,24.79 C19.2 ; v1(6,23.425) 6.019,23.444 6.569,23.444 U4.6 ; v1(6.75,24.325) 6.769,24.344 6.769,24.788 C20.2 ; R25.2 7.894,34.556 7.894,35.194 v1(7.9,35.2) ; v2(14.175,34.625) 14.175,33.718 L4.2 14.525,33.685 14.925,34.085 v2(14.925,34.625) ; L4.2@14.343,33.55 C24.2@16.35,33.55 ; v2(16.05,34.35) 16.05,33.85 C24.2@16.35,33.55 ; v2(16.825,34.35) 16.825,33.85 16.525,33.55 C24.2 ; v2(17.85,34.325) 17.85,33.85 C23.2@18.15,33.55 ; v2(18.575,34.325) 18.575,33.85 18.275,33.55 C23.2 C23.2@18.15,33.55 ; v2(19.675,41.175) 19.675,41.65 19.975,41.95 C26.2 20.4,41.65 v2(20.4,41.175) ; v2(21.375,41.85) C27.2 ; v2(22.2,41.875) U6.6 ; U6.4 22.213,43.688 22.213,44.112 v2(22.225,44.125) ; C24.2@16.35,33.55 C24.2 ; C24.2 C23.2@18.15,33.55
CHIP_PU: R19.1 SW3.2 U1.4 | length 44.8
  [1] Signal w0.15: U1.4 31.375,24.95 v1(31.625,25.2) ; v1(31.85,33.5) 31.896,33.546 43.471,33.546 50.031,40.106 R19.1 64.644,40.106 SW3.2
  [4] Signal w0.15: v1(31.625,25.2) 31.625,33.18 31.85,33.405 v1(31.85,33.5)
FB: R25.1 R26.2 U5.4 | length 2.2
  [1] Signal w0.15: R26.2 R25.1 7.9,33.525 U5.4
FB2: R27.1 R28.2 U6.2 | length 3.3
  [1] Signal w0.127: U6.2 24.751,43.025 24.9,43.174 24.9,44.019 25.375,44.494 R27.1 25.239,44.68 24.639,44.68 R28.2
GND: C1.1 C2.1 C3.1 C4.1 C5.1 C6.1 C7.1 C8.1 C9.1 C10.1 C11.1 C12.1 C13.1 C14.1 C15.1 C16.1 C17.1 C18.1 C19.1 C20.1 C21.1 C23.1 C24.1 C25.1 C26.1 C27.1 C28.1 C29.1 C30.1 C31.1 C32.1 D5.2 J1.A1_B12 J1.B1_A12 J1.SH1 J1.SH2 J1.SH3 J1.SH4 J2.3 J3.05 J3.16 J3.S1 J3.S2 J4.1 pad.3@2,2 pad.3@2,48 pad.3@64,2 pad.3@64,48 R6.1 R14.1 R15.1 R16.1 R17.1 R20.1 R23.1 R26.1 R28.1 R29.2 R30.2 SW1.1 SW2.1 SW4.1 SW5.1 U1.57 U1.58 U1.59 U1.60 U1.61 U1.62 U1.63 U1.64 U1.65 U1.66 U1.67 U1.68 U1.69 U2.4 U2.9 U3.4 U4.2 U5.1 U6.3 U6.7 U7.4 U8.2 Y1.2 Y1.4 | length 67.3
  [1] Signal w0.15: v1(16.475,4.85) 16.475,5.61 C29.1 ; v1@24.5,24.875 v1(24.575,24.875) 25.442,24.875 C12.1 ; C11.1 26.65,25.041 v1(26.65,24.575) ; v1@28.725,30.025 v1(28.85,30.025) 29.729,30.025 C8.1 ; v1@28.975,31.275 C9.1 ; C10.1 29.171,25.075 29.275,24.971 v1@29.275,24.65 ; v1@29.675,28.125 v1(29.75,28.125) 30.321,28.125 C6.1 ; v1@29.675,28.95 v1(29.75,28.95) C7.1 ; v1(33.925,28.65) 33.925,29.329 C16.1 ; v1(34.7,28.6) 34.7,29.244 Y1.2 ; C3.1 34.8,18.984 v1(34.8,18.25) ; v1(35.875,31.6) 35.875,30.731 Y1.4 ; v1(36.8,31.125) 36.8,30.421 C17.1 ; C4.1 v1(37.75,28.05) v1@37.875,28.05 ; C5.1 38.867,19.925 v1(39.475,19.925) ; v1(42.325,26.775) C1.1 ; v1(42.325,27.75) C2.1 ; v1(47.775,26.85) 48.383,26.85 C13.1 ; v1(47.775,27.725) C14.1 ; U2.4 47.875,19.582 v1(47.875,18.625) ; v1(53.3,18.45) U3.4@53.3,19.634
  [1] Signal w0.2: C21.1 6.98,19.07 7.72,19.07 v1(7.725,19.075) ; v1(7.575,20.375) U4.2 ; R23.1 v1(7.8,26.525) ; R26.1 7.9,31.756 v1(7.9,31.1) ; J2.3 8.788,8.363 8.788,7.262 v1(8.825,7.225) ; v1(9,38.7) 9.044,38.744 9.496,38.744 9.752,39 D5.2 9.752,39.112 9.496,39.367 9.432,39.367 9.407,39.393 9.057,39.393 v1(9,39.45) ; v1@9.025,35.375 9.546,35.375 9.946,35.775 9.646,36.075 v1(9.025,36.075) ; v1@9.025,36.9 9.479,36.9 C31.1 9.956,37.4 9.556,37.8 v1(9.025,37.8) ; R20.1 R20.1@9.806,20.65 ; v1@10.25,34.6 v1(10.325,34.6) C25.1 ; v1(11.975,30.925) U5.1 ; U7.4 16.269,5.885 16.484,5.67 C29.1 ; v1(22.775,44.825) 23.456,44.825 R28.1 23.631,44.65 23.631,44.519 24.138,44.012 24.138,43.75 24.213,43.675 U6.3 ; v1(26.85,39.975) 26.075,39.975 C28.1 26.075,40.675 v1(26.85,40.675) ; v1(33.25,36.45) 33.25,35.775 R14.1 ; v1(34.275,36.45) 34.275,35.775 R15.1 ; v1(34.85,8.475) J3.S1 ; v1(36.15,36.45) 36.15,35.8 R6.1 ; v1(40.625,12.625) 40.628,12.622 40.628,11.578 J3.05 ; J1.SH2 40.705,43.325 41.075,42.955 J1.B1_A12 v1(41.825,42.05) ; v1(42.15,39.35) 42.15,39.957 C32.1 ; v1(42.975,39.35) R17.1 ; U8.2@45.099,38.776 v1@45.099,39.749 ; v1(46.125,12.625) 46.127,12.623 46.127,11.578 J3.16 ; v1(47.175,39.25) R16.1 ; C15.1 48.075,39.86 v1(48.075,39.25) ; v1(48.225,42.125) J1.A1_B12 48.27,43 48.975,43 49.345,43.37 J1.SH1 ; v1(54.3,35.6) 55,35.6 R30.2 ; v1(54.325,32.625) 55.05,32.625 R29.2 ; J3.S2 v1(62,8.475) ; v1(61.575,43.15) 61.58,43.155 62.32,43.155 C18.1 ; v1(62.95,37.775) SW2.1 ; v1(63.25,31.35) 64.646,31.35 SW5.1 ; v1(63.35,18.95) 64.647,18.95 SW4.1 ; v1(63.35,20.725) SW1.1
  [1] Signal w0.3: R20.1@9.787,20.669 v1@10.606,20.669
  [1] Signal w0.4: C19.1 5.94,25.861 5.94,26.49 v1(5.95,26.5) ; C20.1 v1(6.8,26.55) ; R20.1 R20.1@9.787,20.669 ; v1@10.606,20.669 v1(10.625,20.65) ; v1(16.075,30.775) 16.075,31.25 16.375,31.55 C24.1 16.5,31.55 16.8,31.25 v1(16.8,30.775) ; v1(17.775,30.775) 17.775,31.25 18.075,31.55 C23.1 18.25,31.55 18.55,31.25 v1(18.55,30.775) ; v1(19.7,44.825) 19.7,44.25 20,43.95 C26.1 20.15,43.95 20.45,44.25 v1(20.45,44.825) ; C27.1 v1(21.375,43.925)
  other v1: 44.5,21.2 45.975,21.225 47.475,21.225 47.475,22.4 45.975,22.425 44.5,22.45 44.5,23.65 45.95,23.65 47.5,23.65 29.25,24.625 28.85,31.275 9.025,35.325 9.025,36.975 45.1,39.75 23.275,42.625 23.275,43.525
GPIO0: R18.1 SW2.2 U1.5 | length 47.4
  [1] Signal w0.15: v1(30.9,32.825) 43.625,32.825 49.15,38.35 56.15,38.35 60.819,33.681 R18.1 64.644,33.681 SW2.2 ; U1.5 30.941,24.515 31.56,24.515 v1(31.625,24.45)
  [4] Signal w0.15: v1(30.9,32.825) 30.9,25.175 v1(31.625,24.45)
GPIO2: R2.1 U1.7 | length 2.8
  [1] Signal w0.15: R2.1 28.971,23.171 29.55,23.75 U1.7
GPIO5: R4.1 U1.10 | length 3.1
  [1] Signal w0.15: R4.1 28.35,21.25 28.525,21.425 28.575,21.425 29.665,22.515 30.871,22.515 U1.10
LED_1: D2.1 U1.40 | length 20.7
  [1] Signal w0.15: U1.40 37.791,25.385 39.26,25.385 47.451,33.576 D2.1
LED_2: D3.1 U1.41 | length 21.7
  [1] Signal w0.15: U1.41 38.725,25.75 49.526,36.551 D3.1
LED_A: C21.2 D1.1 J3.33 R22.2 | length 62.8
  [1] Signal w0.2: R22.2 v1(8.8,26.525) ; v1(54.625,10.475) 54.625,11.57 J3.33
  [1] Signal w0.3: D1.1 5.916,18.069 6.875,18.069 6.925,18.019 C21.2 6.978,18.022 7.722,18.022 v1(7.725,18.025)
  [4] Signal w0.2: v1(8.8,26.525) 8.8,19.1 v1(7.725,18.025) 14.675,11.075 54.025,11.075 v1(54.625,10.475)
LED_K: J3.34 J3.35 J3.36 R20.2 U4.3 | length 54.1
  [1] Signal w0.2: J3.34 55.6,11.575 v1(55.6,10.45) ; J3.35 J3.36
  [1] Signal w0.3: U4.3 8.525,21.437 8.64,21.553 8.778,21.553 8.969,21.744 R20.2 9.753,21.747 10.597,21.747 v1(10.6,21.75)
  [4] Signal w0.2: v1(10.6,21.75) 10.675,21.75 20.55,11.875 54.175,11.875 v1(55.6,10.45)
MTDI: R6.2 U1.47 | length 10.2
  [1] Signal w0.15: U1.47 35.341,26.965 35.341,26.26 v1(35.35,26.25) ; v1(36.15,34) 36.15,34.75 R6.2
  [4] Signal w0.15: v1(35.35,26.25) 35.35,26.75 36.175,27.575 36.175,29.85 35.421,30.604 35.421,33.271 v1(36.15,34)
MTDO: R5.1 U1.45 | length 9.7
  [1] Signal w0.15: U1.45 36.14,26.965 36.14,26.26 v1(36.15,26.25) ; v1(37.15,34) 37.15,34.75 R5.1
  [4] Signal w0.15: v1(36.15,26.25) 36.15,26.9 37.254,28.004 37.254,32.369 37.25,32.373 37.25,33.737 37.217,33.77 37.217,33.933 v1(37.15,34)
NetC16_2: C16.2 L2.2 Y1.1 | length 1.9
  [1] Signal w0.15: L2.2 33.807,30.257 C16.2 33.981,30.381 34.156,30.556 34.156,30.606 34.275,30.725 Y1.1
NetC18_2: C18.2 SW3.1 | length 2.3
  [1] Signal w0.15: C18.2 64.644,44.206 SW3.1
NetC22_1: C22.1 U5.6 | length 7
  [1] Signal w0.3: U5.6 9.65,31.625 11.65,29.625 14.607,29.625 15.265,30.283 C22.1
NetD1_2: D1.2 L3.2 U4.1 | length 6.1
  [1] Signal w0.4: D1.2 2.6,18.286 2.6,19.7 2.9,20 L3.2 3.55,20.05 5.375,20.05 U4.1
NetD2_2: D2.2 R29.1 | length 0.9
  [1] Signal w0.15: R29.1 56.099,32.636 D2.2
NetD3_2: D3.2 R30.1 | length 0.9
  [1] Signal w0.15: R30.1 56.049,35.611 D3.2
NetJ1_A5: J1.A5 R16.2 | length 2.4
  [1] Signal w0.2: J1.A5 46.275,42.259 47.175,41.359 R16.2
NetJ1_A6: J1.A6 J1.B6 U8.4 | length 5.1
  [1] Signal w0.2: J1.B6 v1@44.275,43.95 ; v1(45.279,43.946) 45.257,43.925 45.257,42.973 J1.A6 45.325,42.905 45.325,42.319 46.049,41.595 U8.4
  [4] Signal w0.2: v1(44.2,43.95) 44.202,43.948 v1(45.279,43.946) v1(45.279,43.946)
NetJ1_A7: J1.A7 J1.B7 U8.6 | length 5.8
  [1] Signal w0.2: U8.6 U8.6@44.149,41.595 ; U8.6@44.149,41.745 44.725,42.321 44.725,42.905 J1.A7 44.775,44.4 44.9,44.525 45.658,44.525 45.775,44.408 J1.B7
NetJ1_B5: J1.B5 R17.2 | length 2.1
  [1] Signal w0.2: R17.2 42.975,41.7 43.275,42 J1.B5
NetJ2_4: J2.4 U1.9 | length 30.5
  [1] Signal w0.15: J2.4 9.25,10.15 10.163,11.063 13.938,11.063 v1(25.35,22.475) ; U1.9 v1@31.475,22.95
  [4] Signal w0.15: v1(25.35,22.475) 25.35,22.567 26.412,23.629 30.871,23.629 v1(31.55,22.95)
NetJ2_5: J2.5 R31.1 U1.11 U7.2 | length 35.9
  [1] Signal w0.15: v1(9.75,7.225) J2.5 9.75,9.675 10.375,10.3 19.85,10.3 27.825,18.275 27.825,19.667 28.345,20.187 R31.1 28.345,20.287 28.52,20.462 28.57,20.462 30.223,22.115 30.871,22.115 U1.11 ; v1(14.925,8.4) 15.451,8.4 U7.2
  [4] Signal w0.15: v1(9.75,7.225) 13.75,7.225 v1(14.925,8.4)
NetJ2_6: J2.6 R32.1 U1.12 U7.1 | length 29.2
  [1] Signal w0.15: J2.6 10.25,9.375 10.525,9.65 15.241,9.65 U7.1@16.269,8.622 ; U7.1 U7.1@16.269,8.622 ; U1.12 30.871,21.715 30.49,21.715 29.625,20.85 29.625,20.568 28.338,19.282 R32.1 28.325,19.218 28.325,17.125 20.825,9.625 17.272,9.625 U7.1@16.269,8.622
NetJ3_08: J3.08 U1.14 | length 18.4
  [1] Signal w0.15: U1.14 30.906,16.419 34.025,13.3 41.567,13.3 42.13,12.737 J3.08
NetJ3_09: J3.09 U1.15 | length 17.5
  [1] Signal w0.15: U1.15 31.731,16.419 34.475,13.675 42.075,13.675 42.63,13.12 J3.09
NetJ3_10: J3.10 U1.16 | length 17.5
  [1] Signal w0.15: U1.16 32.131,16.644 34.625,14.15 42.2,14.15 43.13,13.22 J3.10
NetJ3_11: J3.11 U1.17 | length 17.5
  [1] Signal w0.15: U1.17 32.525,20.119 32.525,16.95 34.875,14.6 42.275,14.6 43.63,13.245 J3.11
NetJ3_12: J3.12 U1.18 | length 17.5
  [1] Signal w0.15: U1.18 32.931,17.119 35,15.05 42.425,15.05 44.13,13.345 J3.12
NetJ3_13: J3.13 U1.19 | length 17.6
  [1] Signal w0.15: U1.19 33.331,19.429 33.225,19.323 33.225,17.55 35.35,15.425 42.65,15.425 44.63,13.445 J3.13
NetJ3_37: J3.37 U1.23 | length 26.2
  [1] Signal w0.15: U1.23 34.942,20.114 34.942,19.683 38.65,15.975 53.475,15.975 56.63,12.82 J3.37
NetJ3_38: J3.38 U1.24 | length 26.5
  [1] Signal w0.15: U1.24 35.366,20.09 35.366,19.651 38.567,16.45 53.85,16.45 57.13,13.17 J3.38
NetJ3_39: J3.39 U1.27 | length 26.4
  [1] Signal w0.15: U1.27 36.539,20.117 36.539,19.186 38.75,16.975 49.158,16.975 49.162,16.971 49.538,16.971 49.542,16.975 54.25,16.975 57.63,13.595 J3.39
NetR1_2: R1.2 SW1.2 | length 2.4
  [1] Signal w0.15: R1.2 64.638,24.813 SW1.2
NetR3_1: R3.1 U1.8 | length 3
  [1] Signal w0.15: R3.1 28.437,22.287 28.737,22.287 29.8,23.35 U1.8
NetR9_1: R9.1 U1.31 | length 3.7
  [1] Signal w0.15: U1.31 39.65,21.75 40.65,20.75 40.787,20.75 40.962,20.575 R9.1
NetR10_2: R10.2 U1.32 | length 3.5
  [1] Signal w0.15: U1.32 39.9,22.15 40.5,21.55 R10.2
NetR11_1: R11.1 U1.33 | length 3.2
  [1] Signal w0.15: U1.33 40.937,22.55 R11.1
NetR12_1: R12.1 U1.34 | length 3.5
  [1] Signal w0.15: U1.34 39.925,22.95 40.575,23.6 R12.1
NetR13_1: R13.1 U1.35 | length 3.7
  [1] Signal w0.15: U1.35 39.325,23.35 40.575,24.6 40.937,24.6 R13.1
NetR14_2: R14.2 U1.52 | length 9.5
  [1] Signal w0.15: v1(33.175,26.25) 33.175,26.344 33.331,26.5 U1.52 ; v1(33.25,34) 33.25,34.725 R14.2
  [4] Signal w0.15: v1(33.175,26.25) 33.175,26.263 32.925,26.513 32.925,33.58 33.25,33.905 v1(33.25,34)
NetR15_2: R15.2 U1.51 | length 9.9
  [1] Signal w0.15: U1.51 33.731,26.5 33.925,26.306 v1(33.925,26.25) ; v1(34.275,34) 34.275,34.725 R15.2
  [4] Signal w0.15: v1(33.925,26.25) 33.375,26.8 33.375,33.1 v1(34.275,34)
NetU1_1: U1.1 U4.4 | length 24.9
  [1] Signal w0.15: U4.4 8.525,23.57 8.906,23.951 20.026,23.951 23.625,27.55 29.8,27.55 30.875,26.475 30.875,26.181 U1.1
OV: R22.1 R23.2 U4.5 | length 2.4
  [1] Signal w0.2: U4.5 7.661,23.586 7.661,24.161 7.8,24.3 R23.2 R22.1
SPICLK: R11.2 U2.6 U3.6 | length 14
  [1] Signal w0.15: R11.2 v1(42.65,22.575) ; U2.6 46.6,25.296 v1(46.6,26.325) ; v1(52.025,26.425) 52.025,25.191 U3.6
  [4] Signal w0.15: v1(42.65,22.575) 46.333,26.258 46.533,26.258 v1@46.65,26.375 ; v1(46.6,26.325) 46.695,26.325 46.77,26.25 51.762,26.25 51.937,26.425 v1(52.025,26.425)
SPICS0: R1.1 R10.1 U2.1 | length 24.7
  [1] Signal w0.15: R10.1 42.4,21.55 42.7,21.25 42.7,20.45 43.558,19.592 U2.1 44.05,19.586 v1(44.05,18.625) ; v1(61.475,23.75) 62.275,23.75 R1.1
  [4] Signal w0.15: v1(44.05,18.625) 44.825,19.4 54.975,19.4 59.325,23.75 v1(61.475,23.75)
SPICS1: U1.28 U3.1 | length 16.1
  [1] Signal w0.15: U1.28 36.931,19.575 39.081,17.425 v1(49.35,17.425) ; U3.1 49.5,19.626 v1(49.5,18.45)
  [4] Signal w0.15: v1(49.35,17.425) 49.35,17.52 49.5,17.67 v1(49.5,18.45)
SPID: R13.2 U2.5 U3.5 | length 13.9
  [1] Signal w0.15: R13.2 43.525,24.625 43.7,24.45 47.25,24.45 47.642,24.842 47.716,24.842 U2.5@47.866,24.992 ; U3.5 53.301,24.013 53.213,23.925 48.925,23.925 48.65,24.2 48.65,24.207 U2.5@47.866,24.992 ; U2.5@47.866,24.992 U2.5 U2.5@47.866,24.992
SPIHD: U1.30 U2.7 U3.7 | length 21.2
  [1] Signal w0.15: v1@37,21.35 U1.30 ; U2.7 45.326,26.301 v1(45.35,26.325) 47.252,28.227 50.265,28.227 50.761,27.731 U3.7
  [4] Signal w0.15: v1@37,21.35 37.067,21.417 37.255,21.417 42.063,26.225 45.087,26.225 45.12,26.258 45.283,26.258 v1(45.35,26.325)
  other v1: 37.15,21.35
SPIQ: R12.2 U2.2 U3.2 | length 13.3
  [1] Signal w0.15: R12.2 42.1,23.5 42.775,23.5 43.3,22.975 43.3,20.7 43.575,20.425 44.792,20.425 U2.2@45.326,19.892 ; U2.2 U2.2@45.326,19.892 ; U3.2 50.761,20.589 50.6,20.75 48.75,20.75 48.425,20.425 45.859,20.425 U2.2@45.326,19.892
SPIWP: R9.2 U2.3 U3.3 | length 16
  [1] Signal w0.15: R9.2 42,18.775 42.85,17.925 45.9,17.925 46.446,18.471 46.446,19.442 U2.3 46.596,19.292 46.746,19.142 46.746,19.083 46.775,19.054 46.775,18.5 47.325,17.95 51.55,17.95 52.025,18.425 52.025,19.629 U3.3
SW: C22.2 L4.1 U5.2 | length 4.1
  [1] Signal w0.4: U5.2 13.098,32.575 13.332,32.341 13.332,31.865 13.732,31.465 L4.1 14.219,31.454 C22.2
TFT/RESET: J3.15 R21.1 SW4.2 U1.13 | length 46.5
  [1] Signal w0.15: U1.13 30.871,21.315 30.55,21.315 30.379,21.144 30.379,15.546 35.05,10.875 37.9,10.875 38.275,10.5 45.412,10.5 45.63,10.718 ; J3.15 45.63,10.718 ; SW4.2 64.637,14.86 R21.1 62.29,14.85 62.29,14.015 58.075,9.8 46.548,9.8 45.63,10.718
touch_RST: J2.1 R24.1 SW5.2 U1.6 | length 71.1
  [1] Signal w0.15: J2.1 7.75,9.55 9.925,11.725 13.353,11.725 25.125,23.497 26.214,23.497 26.867,24.15 U1.6 30.941,24.115 31.262,24.115 31.65,23.727 v1(31.65,23.7) ; v1@61.425,27.25 62.021,27.25 62.121,27.35 R24.1 64.654,27.26 SW5.2
  [4] Signal w0.15: v1(31.65,23.7) 32.1,23.25 32.1,20.55 33.425,19.225 43.225,19.225 44.125,20.125 51.15,20.125 58.275,27.25 v1@61.425,27.25
  other v1: 61.425,27.275
USB_N: U1.25 U8.1 | length 23.1
  [1] Signal w0.24: v1(35.617,21) 35.617,20.93 35.731,20.815 U1.25 ; U8.1 44.149,38.465 44.69,37.923 44.775,37.923 44.915,37.783 44.915,37.462 44.724,37.27 v1(44.724,37.2)
  [4] Signal w0.24: v1(35.617,21) 35.617,21.07 35.808,21.262 35.808,21.824 36.505,22.521 36.505,24.33 44.915,32.74 44.915,36.938 44.724,37.13 v1(44.724,37.2)
USB_P: U1.26 U8.3 | length 23.1
  [1] Signal w0.24: U1.26 36.141,20.135 36.141,20.704 36.367,20.93 v1(36.367,21) ; v1(45.474,37.2) 45.474,37.27 45.282,37.462 45.282,37.783 45.422,37.923 45.507,37.923 46.049,38.465 U8.3
  [4] Signal w0.24: v1(36.367,21) 36.367,21.07 36.175,21.262 36.175,21.672 36.872,22.369 36.872,24.178 45.282,32.588 45.282,36.938 45.474,37.13 v1(45.474,37.2)
VBUS: C15.2 C32.2 J1.A4_B9 J1.B4_A9 U8.5 | length 15.7
  [1] Signal w0.2: C32.2 C32.2@42.205,41.007 ; U8.5 45.099,40.975 44.577,40.453 42.649,40.453 42.355,40.747 42.355,40.857 C32.2@42.205,41.007 ; C15.2 47.959,41.022 47.959,41.364 47.425,41.898 J1.A4_B9 47.225,43.155 47.225,44.175 46.548,44.852 43.577,44.852 42.825,44.1 42.825,43.155 J1.B4_A9 42.625,42.1 42.355,41.83 42.355,41.157 C32.2@42.205,41.007
VDD3P3: C1.2 C2.2 C3.2 C4.2 C5.2 C6.2 C7.2 C8.2 C9.2 C10.2 C11.2 C12.2 C13.2 C14.2 C28.2 C29.2 J2.2 J3.06 J3.07 L1.1 L1.2 R2.2 R3.2 R4.2 R5.2 R18.2 R19.2 R21.2 R24.2 R27.2 R31.2 R32.2 U1.2 U1.3 U1.20 U1.29 U1.46 U1.55 U1.56 U2.8 U3.8 U6.1 U7.3 | length 46.8
  [1] Signal w0.2: v1(8.075,7.225) 8.075,7.306 8.2,7.431 8.2,7.8 8.25,7.85 J2.2 ; v1(14.925,6.9) 15.449,6.9 U7.3 ; C29.2 15.444,5.614 15.444,4.856 v1(15.45,4.85) ; v1(24.3,41.75) U6.1 ; v1(24.525,26.525) 25.392,26.525 C12.2 25.456,26.539 25.864,26.131 C11.2 ; R27.2 25.428,43.453 26.122,43.453 v1(26.125,43.45) ; v1(26.55,19.225) 27.294,19.225 R32.2 ; v1(26.55,20.225) 27.295,20.225 R31.2 ; v1(26.6,21.2) R4.2 ; v1(26.6,22.2) R3.2 ; v1(26.6,23.175) 27.308,23.175 R2.2 ; v1(26.6,26.775) 26.6,26.137 C11.2 ; v1(26.875,42) 26.05,42 C28.2 26.1,42.7 v1(26.875,42.7) ; L1.1@27.6,26.15 L1.1@27.622,26.128 ; L1.1 L1.1@27.622,26.128 ; L1.2 L1.2@28.206,26.144 ; v1(28.225,26.75) 28.206,26.731 L1.2@28.206,26.144 ; v1(29.225,26.8) 29.225,26.187 C10.2 ; U1.3 U1.2 30.15,25.75 29.775,26.125 29.287,26.125 C10.2 ; C6.2 31.379,28.125 C6.2@31.401,28.125 ; U1.56@31.739,26.983 U1.56 ; v1(32.125,28.125) C6.2@31.401,28.125 ; v1(32.125,28.95) C7.2 ; U1.55 U1.56 ; v1(32.35,29.95) 31.504,29.95 C8.2 ; v1(32.35,31.275) C9.2 31.435,31.269 C8.2 ; v1(33.725,18.275) 33.731,18.281 33.731,19.001 33.734,19.004 33.734,20.121 U1.20 ; v1(35.525,28.1) 36.083,28.1 C4.2 36.133,28 C4.2@35.983,27.85 ; U1.46 35.732,26.976 35.732,27.6 C4.2@35.982,27.85 ; R5.2 37.175,35.813 v1(37.175,36.525) ; U1.29 37.758,20.952 38.848,20.952 C5.2 38.852,20.952 39.548,20.952 v1(39.55,20.95) ; J3.06@41.115,11.59 J3.06 J3.07 41.615,11.59 41.615,12.61 v1(41.6,12.625) ; v1(43.425,25.3) 44.047,25.3 U2.8@44.055,25.292 ; U2.8 U2.8@44.055,25.292 ; v1(44.7,26.8) 44.079,26.8 C1.2 ; v1(44.7,27.75) C2.2 C1.2 ; v1(48.725,25.2) 49.476,25.2 U3.8 49.504,25.198 C13.2 ; v1(50.125,26.8) 49.529,26.8 C13.2 ; v1(50.125,27.725) C14.2 C13.2 ; v1(61.45,28.275) 61.462,28.286 62.199,28.286 R24.2 ; v1(61.475,41.15) 61.478,41.147 62.247,41.147 R19.2 ; v1@61.5,15.9 61.501,15.899 62.299,15.899 R21.2 ; v1(61.5,34.725) 61.503,34.722 62.247,34.722 R18.2 ; C11.2 26.609,26.128 L1.1@27.622,26.128 ; L1.2@28.206,26.144 28.215,26.153 29.203,26.153 C10.2 ; C6.2@31.401,28.125 31.401,27.494 31.542,27.353 31.568,27.353 31.721,27.2 31.721,26.985 U1.56 ; C6.2@31.401,28.125 31.401,28.947 C7.2 ; C7.2 31.404,29.988 C8.2 ; C1.2 C1.2 U2.8@44.055,25.292
  other v1: 61.475,15.9
VIN: C25.2 C30.2 C31.2 D5.1 J4.2 U5.3 U5.5 | length 7.5
  [1] Signal w0.4: U5.5 10.325,32.575 11.175,33.425 11.875,33.425 U5.3 11.965,33.535 11.965,34.59 C25.2 ; C31.2 11.954,37.374 11.954,35.772 C30.2 11.954,35.767 11.954,34.602 C25.2 ; v1(12.55,34.625) 12.537,34.612 11.968,34.612 C25.2
  other v1: 12.95,35.325 12.95,36.075 12.95,36.975 12.95,37.8 12.95,38.7 12.95,39.45
XTAL_N: C17.2 U1.53 Y1.3 | length 5.3
  [1] Signal w0.15: U1.53 32.931,27.456 33.4,27.925 34.667,27.925 35.59,28.848 35.59,29.084 Y1.3 35.887,29.369 C17.2
XTAL_P: L2.1 U1.54 | length 2.7
  [1] Signal w0.15: U1.54 32.531,27.531 33.131,28.131 L2.1
pads on no net: J1. J1.A8 J1.B8 J2.SH1 J2.SH2 J3.01 J3.02 J3.03 J3.04 J3.14 J3.17 J3.18 J3.19 J3.20 J3.21 J3.22 J3.23 J3.24 J3.25 J3.26 J3.27 J3.28 J3.29 J3.30 J3.31 J3.32 J3.40 J4.MH1 U1.21 U1.22 U1.36 U1.37 U1.38 U1.39 U1.42 U1.43 U1.44 U1.48 U1.49 U1.50 U6.5 U7.5

## Polygon pours and split planes (outlines as drawn)
VIN on [1] Signal "GND" (solid, pour order 0): 10.938,36.112 10.925,36.1 10.925,35.25 11.6,34.575 12.925,34.575 13.8,35.45 13.8,42.475 13.525,42.75 11,42.75 10.6,42.35 10.6,40.2 10.425,40.025 10.425,38.675 10.925,38.175 10.925,36.125
VDD3P3 on [3] Power "GND" (solid, pour order 3): 6.975,8.564 7.981,9.55 13.975,9.55 23.575,19.15 23.575,41.975 24.25,42.65 24.25,44.874 25.226,45.85 29.55,45.85 30.85,44.55 30.85,38.4 32.175,37.075 38.2,37.075 39.1,36.175 39.1,29.35 40.125,28.325 59.125,28.325 59.9,29.1 59.9,43.475 60.925,44.5 64,44.5 64.95,43.55 64.95,13.025 63.425,11.5 26.875,11.5 25.8,11.525 17.575,3.3 13.625,3.3 11.45,5.475 7.5,5.475 6.975,6
+5V on [3] Power "GND" (solid, pour order 1): 8.95,33.625 8.575,34 8.575,35.575 8.125,36.025 6.5,36.025 5.95,35.475 5.95,29.325 2.7,29.325 2.025,28.575 2.025,21.75 2.1,21.75 2.75,21.1 6.75,21.1 7.075,21.425 7.075,22.9 7.325,23.15 7.325,25.15 7.75,25.575 16,25.575 17.075,26.65 17.075,29.283 18.478,30.825 20.575,30.825 23.025,33.275 23.025,43.9 22.575,44.35 18.85,44.35 18.325,43.825 18.325,35.3 18.025,35 14.125,35 12.75,33.625
VIN on [3] Power "GND" (solid, pour order 2): 10.913,36.062 10.9,36.05 10.9,34.85 11.425,34.325 12.7,34.325 13.8,35.425 13.8,42.475 13.525,42.75 10.975,42.75 10.575,42.35 10.575,40.15 10.4,39.975 10.4,38.625 10.9,38.125 10.9,36.075
GND on [2] GND "GND" (solid, pour order 4): -0.05,50.65 66.3,50.65 66.3,-0.3 66.175,-0.175 -0.05,-0.175 -0.05,50.65

## Other copper
[1] Signal:
  text "3" at 212.786,42.354 h2.5
  text "4" at 277.887,42.354 h2.5

## Silkscreen, mask and mechanical layers (free items; w line width, h text height)
Top Overlay:
  text "PU" at 60.825,43.65 h0.75 r90
  text "CHIP" at 60.75,40.45 h0.75 r90
  text "LED 1" at 50.75,36.15 h0.75
  text "GPIO0" at 60.625,34.6 h0.75 r90
  text "LED 2" at 50.825,33.175 h0.75
  text "RST" at 60.65,30.15 h0.75 r90
  text "TOUCH" at 60.6,26.1 h0.75 r90
  text "CS0" at 60.575,22.95 h0.75 r90
  text "SPI" at 60.575,20.7 h0.75 r90
  text "RST" at 60.55,16.875 h0.75 r90
  text "TFT" at 60.525,14.175 h0.75 r90
  text "LORENA SALAZAR" at 21.25,7.125 h0.75
  text "LARA" at 24.775,5.65 h0.75
Mechanical 1:
  lines w0.2: 0,48.975 cw(c1.625,48.875) 1.725,50.5 ; 0,49.025 0,1.725 ccw(c1.625,1.625) 1.525,0 64.525,0 ccw(c64.625,1.625) 66.25,1.525 66.045,48.775 ; 1.725,50.525 64.525,50.525 cw(c64.425,48.9) 66.05,48.8

## Text inside footprints (layer, text, board x,y; h text height)
D5: Mechanical 13 "*" at 12.063,39.683 h1.27 r180